# Altium PCB ESB32_PCB.PcbDoc
Units mil, origin at the board's own origin, x right, y up, seen from the top; angles counter-clockwise.
Board outline 3464.57 x 1446.85 mil, 4 copper layers (Top Layer, +3V3, Int2 (PWR), Bottom Layer), stack 53.912 mil thick; 47 components, 47 nets, 208 pads, 70 vias.
Unrouted connection lines stored in the file: 17.
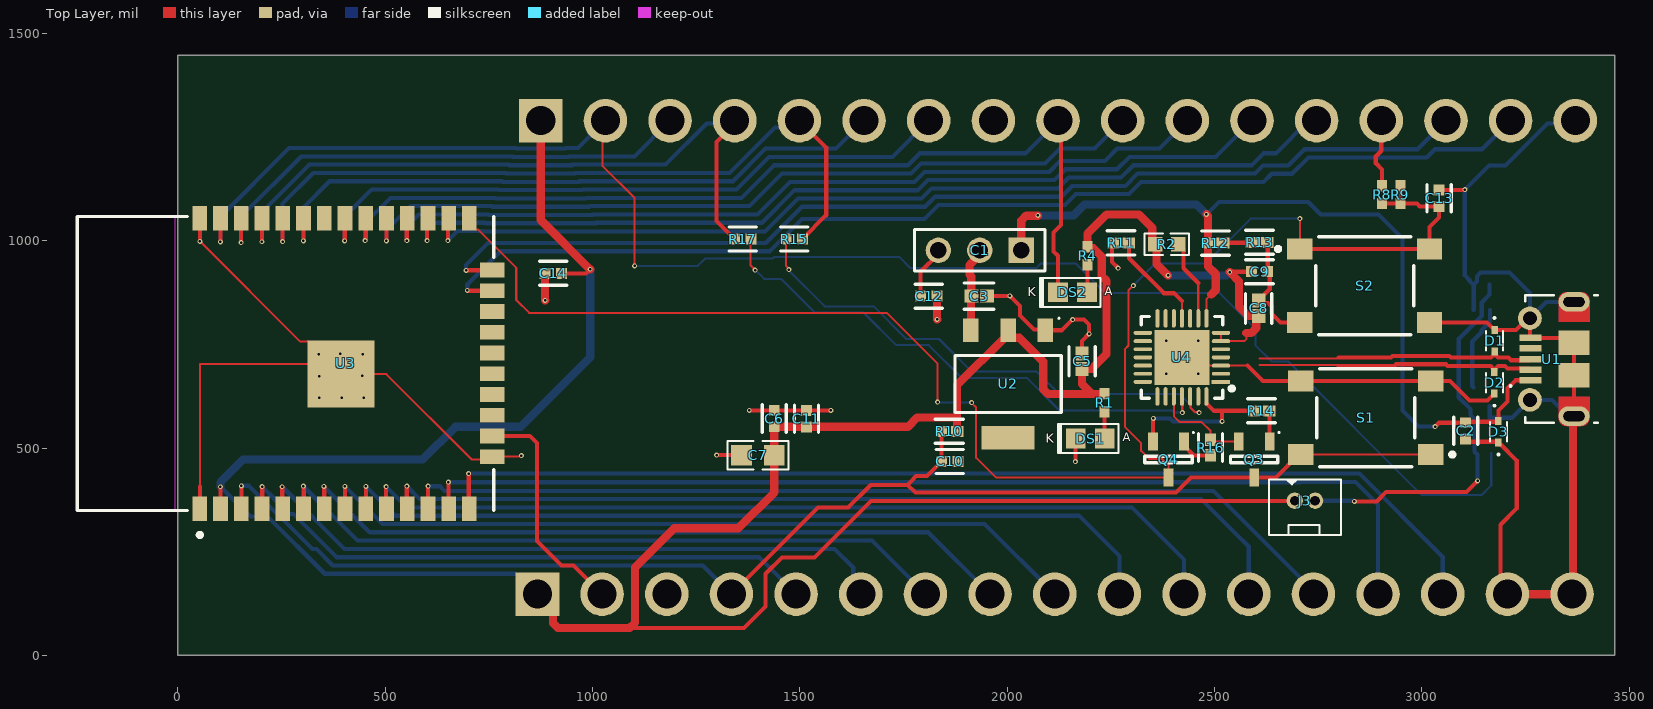
[diagram p0: Top Layer view]
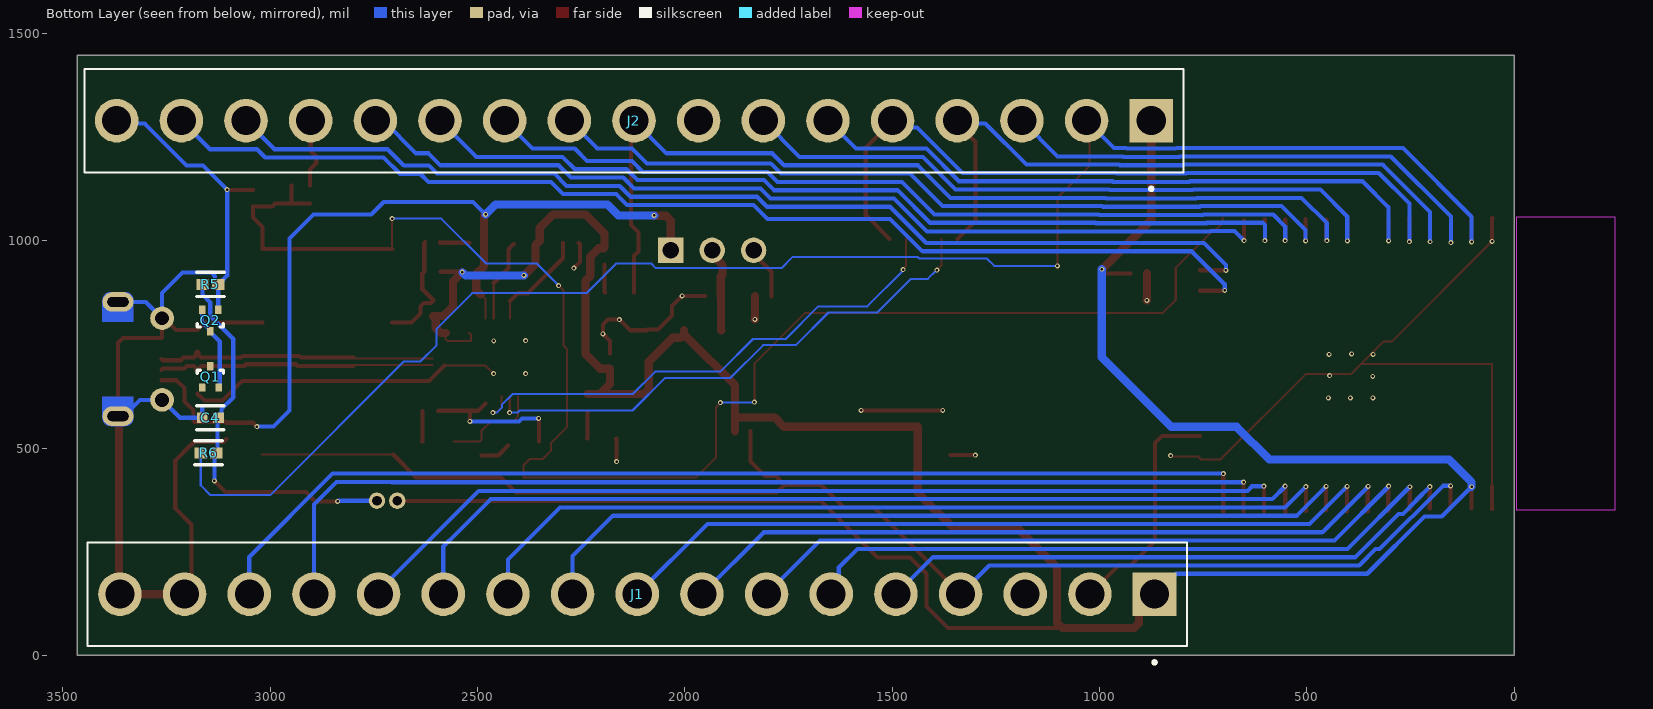
[diagram p1: Bottom Layer view, seen from below]
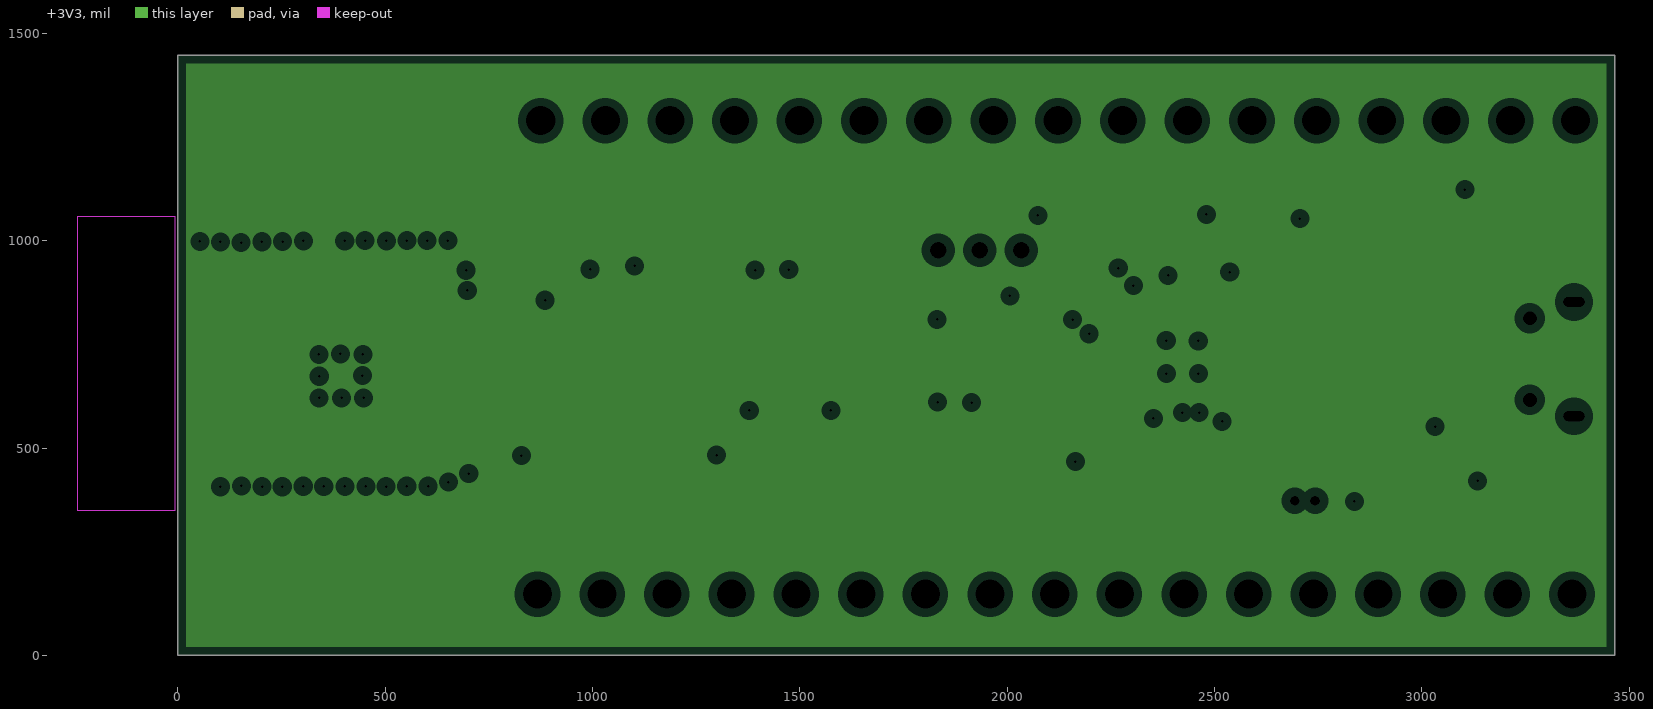
[diagram p2: +3V3, clearances drawn from the general rule]
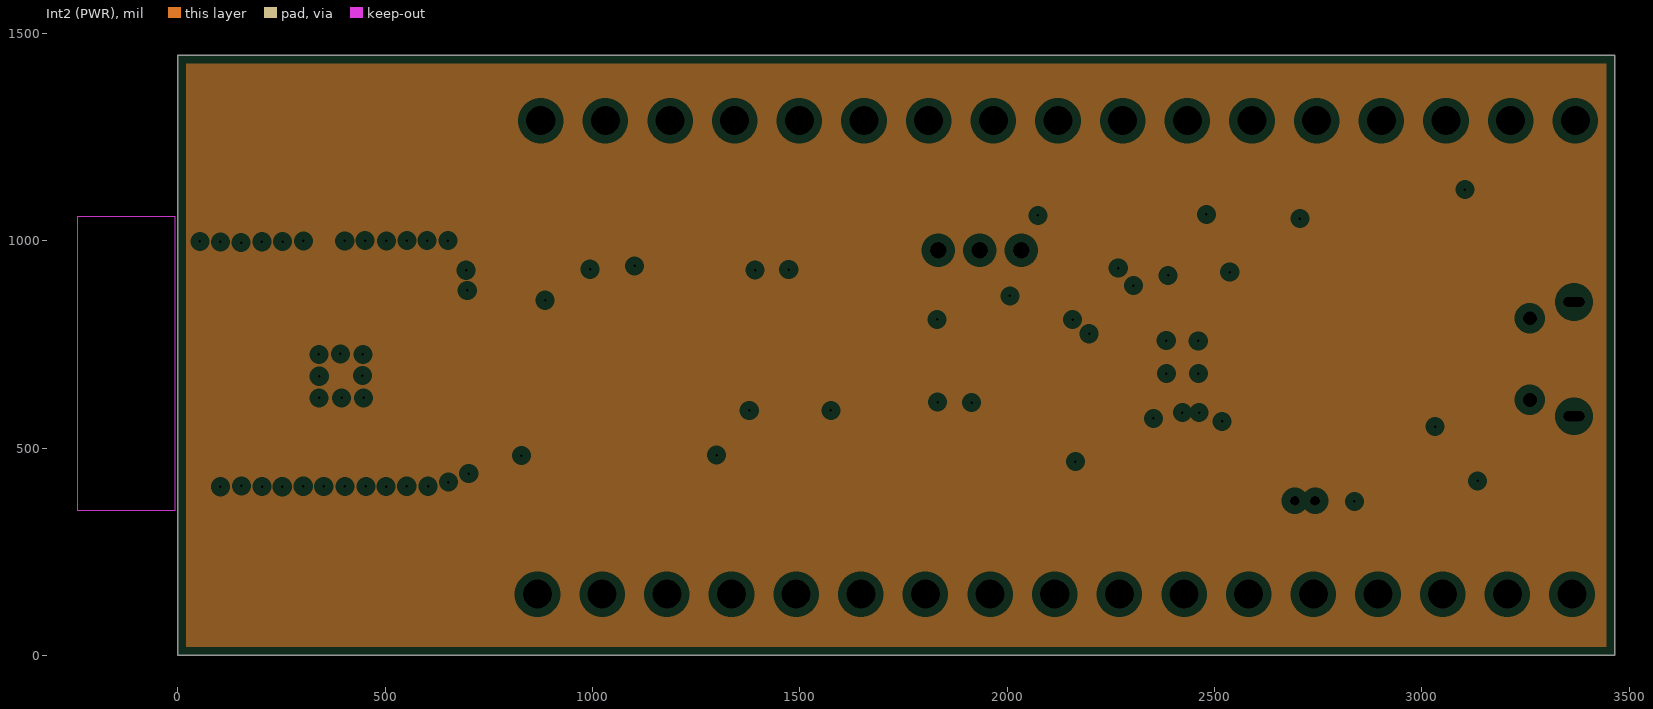
[diagram p3: Int2 (PWR), clearances drawn from the general rule]
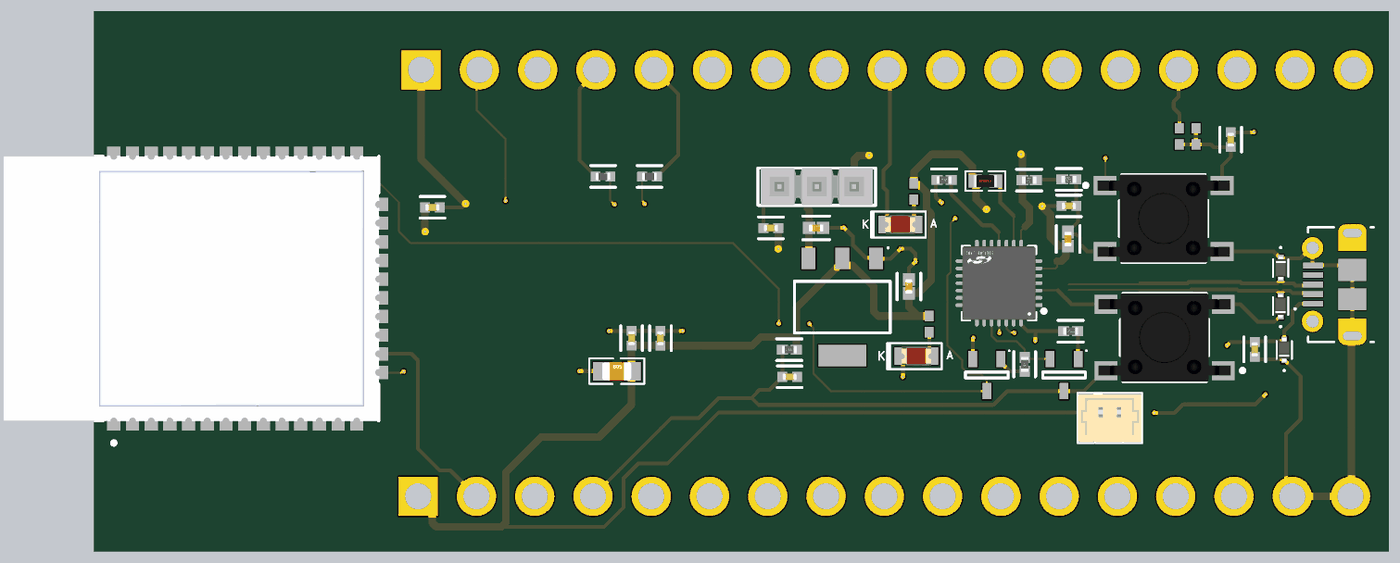
[diagram p4: 3D render of the assembled board from above, using the file's embedded part models]
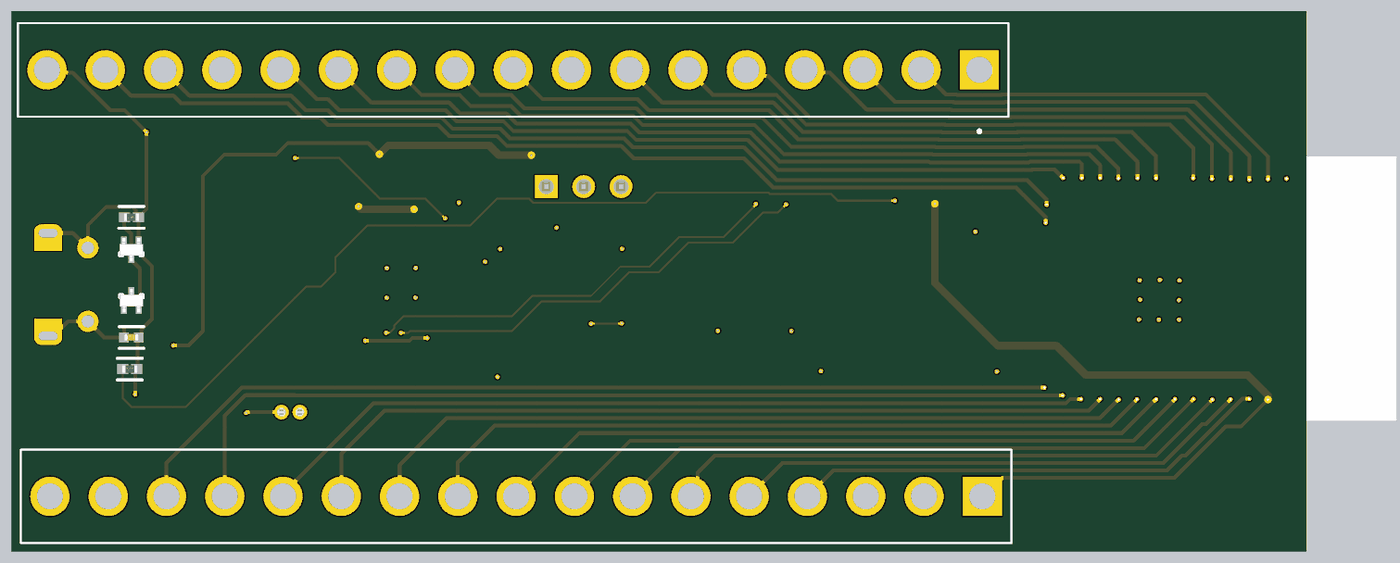
[diagram p5: 3D render of the assembled board from below, using the file's embedded part models]

## Layer stack, top to bottom
Top Solder: solder mask 1, SM-001, Dk 4
Top Layer: signal copper 1.378
Dielectric 1: prepreg 5.1, PP-017, Dk 4.3
Dielectric 2: prepreg 5.1, PP-017, Dk 4.3
+3V3: plane copper 1.378
Dielectric 3: core 28, Core-039, Dk 4.8
Int2 (PWR): plane copper 1.378
Dielectric 4: prepreg 5.1, PP-017, Dk 4.3
Dielectric 5: prepreg 5.1, PP-017, Dk 4.3
Bottom Layer: signal copper 1.378
Bottom Solder: solder mask 1, SM-001, Dk 4

## Board outline
0,0 3464.57,0 3464.57,1446.85 0,1446.85

## Design rules (kind name [scope] priority, off if disabled: settings)
Clearance [All] p1: gap=3.94 ignorepadtopadclearanceinfootprint=TRUE
DiffPairsRouting [All] p1: maxlimit=10 minlimit=10 mostfreqgap=10 toplayer_minwidth=5 toplayer_maxwidth=15 toplayer_prefwidth=10 bottomlayer_minwidth=5 bottomlayer_maxwidth=15 bottomlayer_prefwidth=10 maxuncoupledlength=500
MinimumSolderMaskSliver [All] p1: minsoldermaskwidth=1
PlaneClearance [All] p1: clearance=20
PlaneConnect [All] p1: planeconnectstyle=Direct reliefexpansion=20 reliefentries=4 reliefconductorwidth=10 reliefairgap=10
PolygonConnect [All] p1: connectstyle=Direct reliefconductorwidth=10 reliefentries=4 polygonreliefangle="90 Angle" airgapwidth=10
RoutingVias [All] p1: holewidth=8 width=8 viastyle="Through Hole" minholewidth=8 minwidth=18 maxholewidth=24 maxwidth=24
SilkToSilkClearance [All] p1: silktosilkclearance=5
SilkToSolderMaskClearance [IsPad] p1: minsilkscreentomaskgap=2 clearancetoexposedcopper=TRUE
SolderMaskExpansion [All] p1: expansion=4 istentingtop=FALSE
UnRoutedNet [All] p1: checkbadconnections=TRUE
Width [All] p1: maxlimit=20 minlimit=5 preferedwidth=10
23 further rules are at their usual default settings.

## Classes and differential pairs
differential pair class D90: USB
differential pair USB: +USB_P -USB_N

## Components (designator, comment, footprint, x,y, rotation, side; value= is the part's Value field where it differs from the comment)
C1 "TSW-103-07-T-S" x3Pins_CONN_SMTC-TSW-103-07-x-s 1933.82,976.88 r180 top
C2 "CC0402KPX7R7BB104" Yageo_CC0402KPX 3105.52,541.23 r270 top
C3 "CL05A106MP5NUNC" SAMSUNG_CAP_10uF_0402 1932.19,864.28 r0 top
C4 "CC0402KPX7R7BB104" Yageo_CC0402KPX 3143.74,573.04 r0 bottom
C5 "CL05A106MP5NUNC" SAMSUNG_CAP_10uF_0402 2182.36,709.43 r90 top
C6 "CC0402KPX7R7BB104" Yageo_CC0402KPX 1438.24,571.19 r90 top
C7 "22uF" CAP_0805 1398.87,482.61 r0 top
C8 "4.7uF, PN_CL05A475KP5NRNC" SAMSUNG_CAP_10uF_0402 2608.27,836.61 r90 top
C9 "CC0402KPX7R7BB104" Yageo_CC0402KPX 2608.27,925.2 r0 top
C10 "CC0402KPX7R7BB104" Yageo_CC0402KPX 1861.38,467.67 r0 top
C11 "CC0402KPX7R7BB104" Yageo_CC0402KPX 1515.75,570.87 r90 top
C12 "CC0402KPX7R7BB104" Yageo_CC0402KPX 1811.02,866.14 r0 top
C13 "CC0402KPX7R7BB104" Yageo_CC0402KPX 3041.34,1102.45 r90 top
C14 "CC0402KPX7R7BB104" Yageo_CC0402KPX 905.37,921.22 r180 top
D1 "LESD5D5.0CT1G" LESD5D5.0CT1G 3173.93,759.73 r270 top
D2 "LESD5D5.0CT1G" LESD5D5.0CT1G 3175.62,656.22 r90 top
D3 "LESD5D5.0CT1G" LESD5D5.0CT1G 3185.41,538.57 r90 top
DS1 "GREEN LED" LED_0805 2200.29,522.92 r0 top
DS2 "RED LED" LED_0805 2157.28,875.31 r0 top
J1 "1-640383-7" TE_17Pin_HDR 2041.57,151.64 r0 bottom
J2 "1-640383-7" TE_17Pin_HDR 2049.44,1293.37 r0 bottom
J3 "653002114822" CON2_50_653002114822_TH_ST 2717.78,373.08 r0 top
Q1 "2N7002T-7-F" 2N7002T-7-F 3143.74,671.75 r180 bottom
Q2 "2N7002T-7-F" 2N7002T-7-F 3144.09,807.6 r0 bottom
Q3 "SS8050-G" BJT_NPN_SS8050-G 2598.43,472.44 r270 top
Q4 "SS8050-G" BJT_NPN_SS8050-G 2391.73,472.44 r270 top
R1 "CPF0402B5K1E1" TE_Connectivity_5.1K_0402 2234.64,608.85 r270 top
R2 "1K_Suppose 2 be 0402" RES_0603 2384.95,991.67 r180 top
R4 "560OHM_PN_3521560RFT" TE_Connectivity_5.1K_0402 2193.72,963.62 r90 top
R5 "CRGCQ0402J10K" TE_Connectivity_10K_0402 3143.74,895.67 r180 bottom
R6 "CRGCQ0402J10K" TE_Connectivity_10K_0402 3148.26,487.44 r0 bottom
R8 "22 OHM_PN_AC0402FR-0722RL" TE_Connectivity_5.1K_0402 2903.75,1111.28 r270 top
R9 "22 OHM_PN_AC0402FR-0722RL" TE_Connectivity_5.1K_0402 2948.19,1111.28 r270 top
R10 "CRGCQ0402J10K" TE_Connectivity_10K_0402 1860.24,541.34 r0 top
R11 "NF" TE_Connectivity_10K_0402 2274.51,993.67 r180 top
R12 "6-2176364-6" TE_Connectivity_22.1K_0402#1 2501.92,996.09 r180 top
R13 "47.5K_0402WGF4752TCE" TE_Connectivity_22.1K_0402#2 2608.27,994.09 r180 top
R14 "CRGCQ0402J10K" TE_Connectivity_10K_0402 2613.01,590.79 r0 top
R15 "ERJ-2GE0R00X" PANASONIC_0_OHM_0402 1486.22,1003.94 r180 top
R16 "CRGCQ0402J10K" TE_Connectivity_10K_0402 2491.16,501.03 r270 top
R17 "ERJ-2GE0R00X" PANASONIC_0_OHM_0402 1362.11,1003.94 r0 top
S1 "PTS645SH50SMTR92LFS" "C&K Tactile SW" 2864.38,572.94 r180 top
S2 "PTS645SH50SMTR92LFS" "C&K Tactile SW" 2861.81,891.41 r0 top
U1 "1050170001" MOLEX_1050170001 3363.7,715.54 r90 top
U2 "AMS1117" ASM1117-3V3_SOT229P700X180-4N 1998.03,659.45 r270 top
U3 "." ESP-WROOM-32 399.84,680.94 r90 top
U4 "." CP21002N-A02 2421.26,718.5 r180 top

## Footprints (in the part's own frame and the unit in brackets; to place one, negate y for a bottom-side part, rotate by r counter-clockwise, add the part's x,y. Pads: shape width x height; smd on the part's side, far side on the other; paste and mask are expansions set on the pad)
2N7002T-7-F [mm]
  rect 0.4x0.51 smd paste+0 mask+0: 1(0,0.65) 2(-0.5,-0.65) 3(0.5,-0.65)
  silkscreen extent -0.8,0.2 0.8,0.4, body extent -0.8,-0.8 0.8,0.8, height 0.8
ASM1117-3V3_SOT229P700X180-4N [mm]
  rect 1.45x0.95 smd: 1(-3.173,2.392) 2(-3.173,0.102) 3(-3.173,-2.188)
  rect 1.45x3.25 smd: 4(3.427,0.102)
  silkscreen extent -3.9,-3.15 1.88,3.35
BJT_NPN_SS8050-G [mm]
  rect 1.1x0.6 smd: 1(-1.1,0.874) 2(-1.1,-1.026) 3(1.1,-0.076)
  silkscreen extent -1.68,-1.53 0.2,1.47
"C&K Tactile SW" [mm]
  rect 1.55x1.3 smd paste+0 mask+0: 1(-3.975,2.25) 2(3.975,2.25) 3(-3.975,-2.25) 4(3.975,-2.25)
  silkscreen extent -5.43,-3 3,3, body extent -4.85,-3.1 4.85,3.1, height 0.25
CAP_0805 [mil] "Ceramic Capacitor"
  rect 50x50 smd mask+3: 1(-39.37,0) 2(39.37,0)
  silkscreen extent -73,-34 73,34, body extent -39,-25 39,25, height 31
CON2_50_653002114822_TH_ST [mm] "WR-WTB 1.25 mm Male Vertical Shrouded Header"
  round 1 hole 0.6: 1(-0.625,0) 2(0.625,0)
  silkscreen extent -2.2,-2.1 2.2,1.3, body extent -2.12,-2 2.13,1.2, height 4.21
CP21002N-A02 [mm]
  rect 1.131x0.242 smd paste+0 mask+0: 1(-2.391,1.5)
  rrect100% 1.131x0.242 smd paste+0 mask+0: 2(-2.391,1) 3(-2.391,0.5) 4(-2.391,0) 5(-2.391,-0.5) 6(-2.391,-1) 7(-2.391,-1.5) 15(2.391,-1.5) 16(2.391,-1) 17(2.391,-0.5) 18(2.391,0) 19(2.391,0.5) 20(2.391,1) 21(2.391,1.5)
  rrect100% 0.242x1.131 smd paste+0 mask+0: 8(-1.5,-2.391) 9(-1,-2.391) 10(-0.5,-2.391) 11(0,-2.391) 12(0.5,-2.391) 13(1,-2.391) 14(1.5,-2.391) 22(1.5,2.391) 23(1,2.391) 24(0.5,2.391) 25(0,2.391) 26(-0.5,2.391) 27(-1,2.391) 28(-1.5,2.391)
  rect 3.35x3.35 smd paste-1000 mask+0: 29(0,0)
  silkscreen extent -3.17,-2.5 2.5,2.5, body extent -2.5,-2.5 2.5,2.5, height 0.8
ESP-WROOM-32 [mm]
  rect 1.5x0.9 smd paste+0 mask+0: 1(-8.316,8.806) 2(-8.316,7.536) 3(-8.316,6.266) 4(-8.316,4.996) 5(-8.316,3.726) 6(-8.316,2.456) 7(-8.316,1.186) 8(-8.316,-0.084) 9(-8.316,-1.354) 10(-8.316,-2.624) 11(-8.316,-3.894) 12(-8.316,-5.164) 13(-8.316,-6.434) 14(-8.316,-7.704) 25(9.484,-7.704) 26(9.484,-6.434) 27(9.484,-5.164) 28(9.484,-3.894) 29(9.484,-2.624) 30(9.484,-1.354) 31(9.484,-0.084) 32(9.484,1.186) 33(9.484,2.456) 34(9.484,3.726) 35(9.484,4.996) 36(9.484,6.266) 37(9.484,7.536) 38(9.484,8.806)
  rect 0.9x1.5 smd paste+0 mask+0: 15(-5.126,-9.094) 16(-3.856,-9.094) 17(-2.586,-9.094) 18(-1.316,-9.094) 19(-0.046,-9.094) 20(1.224,-9.094) 21(2.494,-9.094) 22(3.764,-9.094) 23(5.034,-9.094) 24(6.304,-9.094)
  rect 4.1x4.1 smd paste+0 mask+0: 39(-0.066,0.156)
  Keep-Out Layer region: -8.416,10.306 9.584,10.306 9.584,16.306 -8.416,16.306
  silkscreen extent -10.04,-9.19 9.58,16.31, body extent -9.17,-9.94 10.33,16.51, height 0.25
LED_0805 [mm] "LED"
  rect 1.2x1.2 smd mask+0.076: A(0.889,0) K(-0.889,0)
  silkscreen extent -1.99,-0.89 1.73,0.89, body extent -1.01,-0.62 1.01,0.63, height 1.1
LESD5D5.0CT1G [mm]
  rect 0.48x0.4 smd: 1(-0.635,0.025) 2(0.685,0.025)
  silkscreen extent -1.42,-0.49 0.63,0.55, body extent -0.77,-0.37 0.83,0.43, height 0.7
MOLEX_1050170001 [mm]
  rect 0.4x1.35 smd mask+0.064: 1(-1.325,2.601) 2(-0.675,2.601) 3(-0.025,2.601) 4(0.625,2.601) 5(1.275,2.601)
  round 1.45 hole 0.85 mask+0.064: SH1(-2.525,2.626) SH2(2.475,2.626)
  oval 1.2x1.9 hole 0.6 slot 1.3 at 90 deg mask+0: SH3(-3.525,-0.074) SH6(3.475,-0.074)
  rect 1.5x1.9 smd mask+0.064: SH4(-1.025,-0.074) SH5(0.975,-0.074)
  Top Layer region: -2.325,-1.024 -3.625,-1.024 -3.651,-1.023 -3.677,-1.021 -3.703,-1.018 -3.729,-1.013 -3.754,-1.007 -3.78,-1 -3.804,-0.991 -3.828,-0.981 -3.852,-0.97 -3.875,-0.957 -3.897,-0.943 -3.919,-0.929 -3.94,-0.913 -3.96,-0.896 -3.979,-0.878 -3.997,-0.859 -4.014,-0.839 -4.03,-0.818 -4.044,-0.796 -4.058,-0.774 -4.071,-0.751 -4.082,-0.727 -4.092,-0.703 -4.101,-0.679 -4.108,-0.653 -4.114,-0.628 -4.119,-0.602 -4.122,-0.576 -4.124,-0.55 -4.125,-0.524 -4.125,0.376 -4.124,0.402 -4.122,0.428 -4.119,0.454 -4.114,0.48 -4.108,0.505 -4.101,0.531 -4.092,0.555 -4.082,0.579 -4.071,0.603 -4.058,0.626 -4.044,0.648 -4.03,0.67 -4.014,0.691 -3.997,0.711 -3.979,0.73 -3.96,0.748 -3.94,0.765 -3.919,0.781 -3.897,0.795 -3.875,0.809 -3.852,0.822 -3.828,0.833 -3.804,0.843 -3.78,0.852 -3.754,0.859 -3.729,0.865 -3.703,0.87 -3.677,0.873 -3.651,0.875 -3.625,0.876 -2.325,0.876
  Top Layer region: 3.601,0.875 3.627,0.873 3.653,0.87 3.679,0.865 3.704,0.859 3.73,0.852 3.754,0.843 3.778,0.833 3.802,0.822 3.825,0.809 3.847,0.795 3.869,0.781 3.89,0.765 3.91,0.748 3.929,0.73 3.947,0.711 3.964,0.691 3.98,0.67 3.994,0.648 4.008,0.626 4.021,0.603 4.032,0.579 4.042,0.555 4.051,0.531 4.058,0.505 4.064,0.48 4.069,0.454 4.072,0.428 4.074,0.402 4.075,0.376 4.075,-0.524 4.074,-0.55 4.072,-0.576 4.069,-0.602 4.064,-0.628 4.058,-0.653 4.051,-0.679 4.042,-0.703 4.032,-0.727 4.021,-0.751 4.008,-0.774 3.994,-0.796 3.98,-0.818 3.964,-0.839 3.947,-0.859 3.929,-0.878 3.91,-0.896 3.89,-0.913 3.869,-0.929 3.847,-0.943 3.825,-0.957 3.802,-0.97 3.778,-0.981 3.754,-0.991 3.73,-1 3.704,-1.007 3.679,-1.013 3.653,-1.018 3.627,-1.021 3.601,-1.023 3.575,-1.024 2.275,-1.024 2.275,0.876 3.575,0.876
  Bottom Layer region: 3.601,0.875 3.627,0.873 3.653,0.87 3.679,0.865 3.704,0.859 3.73,0.852 3.754,0.843 3.778,0.833 3.802,0.822 3.825,0.809 3.847,0.795 3.869,0.781 3.89,0.765 3.91,0.748 3.929,0.73 3.947,0.711 3.964,0.691 3.98,0.67 3.994,0.648 4.008,0.626 4.021,0.603 4.032,0.579 4.042,0.555 4.051,0.531 4.058,0.505 4.064,0.48 4.069,0.454 4.072,0.428 4.074,0.402 4.075,0.376 4.075,-0.524 4.074,-0.55 4.072,-0.576 4.069,-0.602 4.064,-0.628 4.058,-0.653 4.051,-0.679 4.042,-0.703 4.032,-0.727 4.021,-0.751 4.008,-0.774 3.994,-0.796 3.98,-0.818 3.964,-0.839 3.947,-0.859 3.929,-0.878 3.91,-0.896 3.89,-0.913 3.869,-0.929 3.847,-0.943 3.825,-0.957 3.802,-0.97 3.778,-0.981 3.754,-0.991 3.73,-1 3.704,-1.007 3.679,-1.013 3.653,-1.018 3.627,-1.021 3.601,-1.023 3.575,-1.024 2.275,-1.024 2.275,0.876 3.575,0.876
  Bottom Layer region: -2.325,-1.024 -3.625,-1.024 -3.651,-1.023 -3.677,-1.021 -3.703,-1.018 -3.729,-1.013 -3.754,-1.007 -3.78,-1 -3.804,-0.991 -3.828,-0.981 -3.852,-0.97 -3.875,-0.957 -3.897,-0.943 -3.919,-0.929 -3.94,-0.913 -3.96,-0.896 -3.979,-0.878 -3.997,-0.859 -4.014,-0.839 -4.03,-0.818 -4.044,-0.796 -4.058,-0.774 -4.071,-0.751 -4.082,-0.727 -4.092,-0.703 -4.101,-0.679 -4.108,-0.653 -4.114,-0.628 -4.119,-0.602 -4.122,-0.576 -4.124,-0.55 -4.125,-0.524 -4.125,0.376 -4.124,0.402 -4.122,0.428 -4.119,0.454 -4.114,0.48 -4.108,0.505 -4.101,0.531 -4.092,0.555 -4.082,0.579 -4.071,0.603 -4.058,0.626 -4.044,0.648 -4.03,0.67 -4.014,0.691 -3.997,0.711 -3.979,0.73 -3.96,0.748 -3.94,0.765 -3.919,0.781 -3.897,0.795 -3.875,0.809 -3.852,0.822 -3.828,0.833 -3.804,0.843 -3.78,0.852 -3.754,0.859 -3.729,0.865 -3.703,0.87 -3.677,0.873 -3.651,0.875 -3.625,0.876 -2.325,0.876
  silkscreen extent -3.93,-1.52 3.87,3.86
PANASONIC_0_OHM_0402 [mil]
  rect 26.31x26.48 smd paste+0 mask+0: 1(-19.77,0) 2(19.77,0)
  silkscreen extent -33,-29 33,29, body extent -41,-21 41,21, height 10
RES_0603 [mil] "CASE: 0603"
  rect 35x35 smd mask+3: 1(-27.5,0) 2(27.5,0)
  silkscreen extent -53,-26 54,26, body extent -31,-16 31,16, height 18
SAMSUNG_CAP_10uF_0402 [mil]
  rect 33.69x31.74 smd paste+0 mask+0: 1(-18.71,2) 2(18.71,2)
  silkscreen extent -36,-30 36,34, body extent -43,-22 43,26, height 10
TE_17Pin_HDR [mil]
  rect 105x105 hole 70: 1(-1174.24,4)
  round 105 hole 70: 2(-1018.34,4) 3(-862.43,4) 4(-706.53,4) 5(-550.62,4) 6(-394.72,4) 7(-238.81,4) 8(-82.91,4) 9(73,4) 10(228.91,4) 11(384.81,4) 12(540.72,4) 13(696.62,4) 14(852.53,4) 15(1008.43,4) 16(1164.34,4) 17(1320.24,4)
  silkscreen extent -1252,-121 1398,172
TE_Connectivity_5.1K_0402 [mm]
  rect 0.7x0.6 smd: 1(-0.55,0) 2(0.55,0)
TE_Connectivity_10K_0402 [mil]
  rect 29.91x26.48 smd paste+0 mask+0: 1(-18.75,-1) 2(18.75,-1)
  silkscreen extent -34,-30 34,28, body extent -20,-11 20,9, height 16
TE_Connectivity_22.1K_0402#1 [mil]
  rect 31.88x26.48 smd paste+0 mask+0: 1(-17.77,2) 2(17.77,2)
  silkscreen extent -34,-27 34,31, body extent -42,-19 42,23, height 10
TE_Connectivity_22.1K_0402#2 [mil]
  rect 31.88x26.48 smd paste+0 mask+0: 1(-17.77,-2) 2(17.77,-2)
  silkscreen extent -34,-31 34,27, body extent -20,-12 20,8, height 16
x3Pins_CONN_SMTC-TSW-103-07-x-s [mm]
  rect 1.55x1.55 hole 1.02: 1(-2.54,0)
  round 1.55 hole 1.02: 2(0,0) 3(2.54,0)
  silkscreen extent -4,-1.27 4,1.27, body extent -3.81,-1.27 3.81,1.27, height 8.38
Yageo_CC0402KPX [mil]
  rect 26.31x26.48 smd paste+0 mask+0: 1(-19.77,0) 2(19.77,0)
  silkscreen extent -33,-29 33,29, body extent -41,-21 41,21, height 10

## Part data
C1: library part HDR_3x_Pins_Male_Board/Board/Cable, "0.025\" SQ Post Header, Through-hole, Vertical, -55 to 105 degC, 2.54 mm Pitch, 3-Pin, Male, RoHS"
C2 C4 C6 C9 C10 C11 C12 C13 C14: library part CAP_100nF_0.1uF_10V_0402, "Multilayer Ceramic Capacitor, 0.1 uF, 10 V, ± 10%, X7R, 0402 [1005 Metric]"
C3 C5 C8: library part CAP_10uF_10V_SMD_0402, "Multilayer Ceramic Capacitor, 10 uF, 10 V, ± 20%, X5R, 0402 [1005 Metric]"
C7: library part CAP_22uF-25V-20%-0805, "22µF ±20% 25V Ceramic Capacitor X5R 0805 (2012 Metric)", Alternate Part Number-1=NA, Case/Package=0805, Manufacturer=Murata, Manufacturer Part Number=GRM21BR61E226ME44L, Supplier Part Number-1=C86816, Supplier-1=LCSC
D1 D2 D3: library part DIO_Transient_VOl_Suppressor_ESD_PROTECTION, "Transient Voltage Suppressors for ESD Protection"
DS1: library part LED_GREEN-2.2-20mA-0805, "Green 569nm LED Indication - Discrete 2.1V 0805 (2012 Metric)", Alternate Part Number-1=NA, Case/Package=0805, Manufacturer="Vishay Lite-On", Manufacturer Part Number=LTST-C171GKT, Supplier Part Number-1=LTST-C171GKT, Supplier-1="SP ROAD"
DS2: library part LED_RED-2V-20mA-0805, "Red 631nm LED Indication - Discrete 2V 0805 (2012 Metric)", Alternate Part Number-1=NA, Case/Package=0805, Manufacturer="Vishay Lite-On", Manufacturer Part Number=LTST-C171KRKT, Supplier Part Number-1=LTST-C171KRKT, Supplier-1="SP ROAD"
J1 J2: library part HDR_CON_x17Pin, "Conn Unshrouded Header HDR 17 POS 3.96mm Solder ST Thru-Hole Package"
J3: library part CON-PLG_2X1-50-ST-TH, "2 Pins, 1 Row 1.25mm Pitch, Straight Connector, male", Alternate Part Number-1=NA, Case/Package=TH-CON, Crimp Part Number=653153128130, Manufacturer=JST, Mating Part Number=653002113322, Manufacturer Part Number=653002114822, Supplier Part Number-1=653002114822, Supplier-1=WURTH
Q1 Q2: library part TRN_MOSFET_N-CH_60V_0.115A, "Transistor MOSFET N-CH 60V 0.115A 3-Pin SOT-523 T/R - Tape and Reel"
Q3 Q4: library part BJT_SS8050-G_NPN, "Bipolar Transistors - BJT NPN TRANSISTOR 1.5A 40V"
R1 R4 R8 R9: library part RES_5.1K_0402, "Res Thin Film 0402 5.1K Ohm 0.1% 1/16W ±25ppm/°C Molded SMD SMD Paper T/R"
R2: library part RES_1K-0.1W-1%-0603, "1 kOhms ±1% 0.1W, 1/10W Chip Resistor 0603 (1608 Metric) Automotive AEC-Q200 Thick Film", Alternate Part Number-1=0603WAF1001T5E, Case/Package=0603, Manufacturer=Walsin, Manufacturer Part Number=WR06X1001FTL, Supplier Part Number-1=WR06X1001FTL, Supplier-1=SIRICOM
R5 R6 R10 R11 R14 R16: library part RES_10K_0402_SMD, "SMD Chip Resistor, 10 kOhm, ± 5%, 63 mW, 0402 [1005 Metric], Thick Film, General Purpose"
R12 R13: library part RES_22.1KOHM_0402, "Res Precision Thin Film 22.1kOhm 0.1% 62.5mW 10ppm/°C 2-Pin 0402 SMD T/R"
R15 R17: library part RES_0_OHM_0402, "SMD Chip Resistor, Jumper, 0 ohm, 100 mW, 0402 [1005 Metric], Thick Film, General Purpose"
S1 S2: library part SW_Tactile_0.05A,12VDC_SMD, "Switch Tactile N.O. SPST Round Button Gull Wing 0.05A 12VDC 100000Cycles 1.96N SMD T/R"
U1: library part "USB_Micro_B 2.0_MOLEX", "USB - micro B USB 2.0 Receptacle Connector 5 Position Surface Mount, Right Angle; Through Hole"
U2: library part VREG_1117_1A_LDO, "ASM1117, 5V to 3V3, 1A."
U3: library part IC_Espressif_ESP-WROOM-32_eec, "IC SPRESSIF ESP32 BLUETOOTH WIFI MESP-WROOM-32 is a powerful, generic Wi-Fi+BT+BLE MCU module"
U4: library part IC_CP2102N-A02-GQFN28R, "Integrated Circuit Interface USB for UART Controller; 3-3.6V; -40+85 deg.C; SMD; QFN28"

## Via types
v1: diameter 12, hole 6, Top Layer to Bottom Layer, 70 vias

## Nets (pads, with @x,y where several pads share a name; then routed paths per layer and width w, separated by ;. In a path a pad name is that pad's centre, name@x,y a point inside that pad or via, vN(x,y) a via of type N, cw(c..) or ccw(c..) an arc to the next point about the centre after c; other vN are vias at no path point)
+3V3: C5.1 C6.1 C7.2 C8.1 C9.1 C11.1 C14.1 J1.1 J2.1 J3.1 R1.1 R2.2 R4.2 R10.2 U2.2 U3.2 U4.6 U4.7 | length 7784.6
  Top Layer w5: U4.7@2519.69,777.56 2515.38,773.25 U4.6 2571.82,757.87 2576.65,762.7 2576.65,766.85 2576.6,766.9 2576.6,777.56
  Top Layer w10: U3.2@102.84,354.02 v1(102.84,406.66) ; C14.1 983.86,921.22 993.73,931.09 v1(994.27,931.09) ; 1089.58,65.96 1365.17,65.96 1417.32,118.11 1417.32,196.85 1456.69,236.22 1535.43,236.22 1671.69,372.48 2692.58,372.48 J3.1 ; v1(2536.54,924.36) 2537.08,924.36 2537.92,925.2 C9.1
  Top Layer w20: J1.1 904.79,110.17 904.79,77.68 916.5,65.96 1089.58,65.96 1102.36,78.74 1102.36,211.84 1197.16,306.64 1351.52,306.64 1438.24,393.36 C7.2 C6.1 ; J2.1 875.2,1050.16 v1(994.27,931.09) ; C6.1@1438.4,551.26 1515.59,551.26 C11.1 1760.48,551.1 1782.96,573.58 1878.99,573.58 ; R10.2 1878.99,651.48 1993.33,765.83 U2.2@2002.03,774.53 ; U2.2 U2.2@2002.03,774.53 ; R1.1 2204.16,630.5 ; v1(2387.83,916.15) 2359.81,944.17 2359.81,989.31 2349.95,999.17 2349.95,1030.34 2317.29,1062.99 2239.76,1062.99 2193.72,1016.95 2193.72,983.31 2195.53,981.5 2208.07,981.5 2227.72,961.85 2227.72,915.4 2239.48,903.63 2239.48,726.27 2204.51,691.3 2180.94,691.3 C5.1 2180.36,654.3 2204.16,630.5 ; v1(2536.54,924.36) 2559.06,901.84 2559.06,841.54 2582.11,818.48 2605.69,818.48 C8.1 2600.4,812.03 2600.4,789.27 2588.68,777.56 2576.6,777.56 ; U2.2@2002.03,774.53 2010.73,765.83 2029.45,765.83 2086.61,708.66 2086.61,642.22 2098.33,630.5 2204.16,630.5
  Bottom Layer w10: v1(102.84,406.66) 174.85,334.65 216.54,334.65 354.33,196.85 813.96,196.85 815.68,195.14 819.82,195.14 J1.1
  Bottom Layer w20: v1(102.84,406.66) 102.84,417.8 157.48,472.44 590.55,472.44 669.29,551.18 826.77,551.18 994.27,718.68 v1(994.27,931.09) ; v1(2387.83,916.15) 2528.87,916.15 v1@2535.85,923.13
+5V: C1.2 C3.1 U2.3 | length 193
  Top Layer w20: U2.3 1912.67,785.17 C3.1@1912.67,865.48 ; C3.1 1913.48,913.46 1909.03,917.9 1909.03,940.99 C1.2@1933.82,965.78
+5V_EXT: C1.3 C12.1 | length 128.4
  Top Layer w10: C12.1 1791.25,925.11 1833.82,967.68 C1.3
+5V_VBUS: C1.1 C2.1 D3.2 R12.2 U1.1 U4.8 | length 2153.6
  Top Layer w5: U4.8 2480.31,858.51 2491.94,870.14
  Top Layer w10: v1@3031.5,551.18 3041.31,561 C2.1 3107.8,563.27 3182.14,563.27 D3.2 3184.41,590.61 3206.44,612.63 3206.44,644.4 3225.4,663.36 U1.1
  Top Layer w20: C1.1 2033.82,1048.66 2045.54,1060.38 v1@2073.84,1060.38 ; v1(2480.31,1063.53) 2484.15,1059.69 R12.2 2484.15,937.83 2502.74,919.24 2502.74,880.94 2491.94,870.14
  Bottom Layer w10: v1(2480.31,1063.53) 2480.86,1063.53 2510.4,1093.07 2725.82,1093.07 2755.91,1062.99 2894.8,1062.99 2952.76,1005.04 2952.76,590.55 2991.58,551.72 v1(3031.5,551.72)
  Bottom Layer w20: v1(2073.84,1060.92) 2160.24,1060.92 2186.53,1087.2 2456.1,1087.2 v1@2480.31,1062.99
DTR: Q4.2 R14.1 U4.28 | length 369.7
  Top Layer w10: Q4.2@2351.79,516.2 v1@2351.79,570.39 ; U4.28@2480.75,607.3 2498.26,589.79 2519.69,589.79 ; v1(2518.21,564.25) 2518.21,588.31 2519.69,589.79 ; R14.1 2519.69,589.79
  Bottom Layer w10: v1(2352.47,571.62) 2392.29,571.62 2399.66,564.25 2517.28,564.25 v1@2517.82,563.7
EN: C10.1 J1.4 Q3.3 R10.1 S1.1 S1.2 U3.3 | length 3362.5
  Top Layer w5: S1.2@2702.96,484.36 S1.2 S1.1
  Top Layer w10: U3.3@153.27,355.75 v1(153.27,408.94) ; J1.4 1544.07,356.66 1616.51,356.66 1670.87,411.03 1759.85,411.03 ; R10.1 1841.55,540.27 C10.1 C10.1 1841.62,467.59 1806.3,432.28 1780.08,432.28 1774.23,426.42 1774.23,425.4 1759.85,411.03 ; S1.2@2702.96,484.36 2647.73,429.13 Q3.3 2443.41,429.13 2406.76,392.48 1778.4,392.48 1759.85,411.03
  Bottom Layer w10: v1(153.27,408.94) 171.77,408.94 324.49,256.22 334.33,256.22 373.7,216.85 1265.83,216.85 J1.4
GND: C2.2 C3.2 C4.2 C5.2 C6.2 C7.1 C8.2 C9.2 C10.2 C11.2 C12.2 C13.2 C14.2 D1.1 D2.1 D3.1 DS1.K J1.3 J1.16 J1.17 J2.8 J2.17 Q2.2 R5.2 R11.2 R13.1 S1.3 S1.4 S2.3 S2.4 U1.5 U1.SH1 U1.SH2 U1.SH3 U1.SH4 U1.SH5 U1.SH6 U2.1 U3.1 U3.15 U3.38 U3.39 U4.3 U4.29 | length 6658.8
  Top Layer w5: v1(53.52,998.21) 295.18,756.56 315.49,756.56 U3.39@346.34,725.71 ; 53.71,407.64 53.61,407.73 53.61,702.93 U3.39@369.12,702.93 ; v1(340.05,725.71) U3.39@346.34,725.71 ; v1(828.29,481.85) 826.4,481.85 823.68,479.13 761.81,479.13 755.12,472.44 708.66,472.44 502.76,678.35 U3.39 U3.39@369.12,702.93 ; v1(2460.87,679.36) 2480.32,698.82 2578.94,698.82 ; U3.39@346.34,725.71 U3.39@369.12,702.93
  Top Layer w10: U3.1 53.71,354.1 53.71,407.64 ; U3.38 53.52,1053.96 v1(53.52,998.21) ; v1(1299.21,483) C7.1@1359.1,483 ; v1(1377.95,590.55) 1378.16,590.75 C6.2@1438.03,590.75 ; C6.2@1438.4,590.8 C11.2@1515.59,590.8 ; C11.2 v1(1574.72,590.64) v1@1574.8,590.55 ; C3.2 1951.53,866.91 v1(2006.29,866.91) 2030.85,842.36 2030.85,819.6 2064.35,786.1 2090.46,786.1 2092.68,783.88 2131.33,783.88 2157.76,810.31 2185.4,810.31 2197.45,798.27 v1(2197.45,775.54) 2180.13,758.23 2180.13,728.37 C5.2 ; v1(2164.16,467.52) 2164.16,468.06 2164.86,468.76 2164.86,522.49 DS1.K ; R11.2 2252.72,991.62 2252.72,948.63 v1(2267.62,933.72) ; 2578.94,698.82 2616.24,661.53 S1.4 3067.4,661.53 3114.4,614.53 3157.92,614.53 3170.17,626.79 3171.75,626.79 3174.62,629.66 D2.1 ; R13.1 2628.04,994.09 C9.2 2632.83,920.4 2632.83,882.86 2606.27,856.3 C8.2 2611.85,849.75 2628.35,849.75 2637.14,840.96 2637.14,824.46 2658.77,802.82 S2.3 ; S2.4 3156.82,802.82 3170.48,789.16 3172.06,789.16 3174.93,786.29 D1.1 3226.99,784.71 3255.24,812.97 U1.SH2 3260.32,766.71 U1.5 3354.8,765.72 U1.SH5 U1.SH4 U1.SH3 ; C13.2 3102.03,1122.22 3102.75,1122.94 v1(3103.29,1122.94) ; C2.2 3111.83,515.16 3182.84,515.16 D3.1 3184.41,512.01 3187.29,509.13 3188.86,509.13 3228.35,469.65 3228.35,354.33 3188.98,314.96 3188.98,164.57 J1.16
  Top Layer w20: C14.2 885.6,856.52 v1(885.83,856.3) ; C12.2 v1(1830.79,810.19) v1@1830.93,810.06 ; J1.16 J1.17 3364.21,150.04 3364.21,574.34 U1.SH3
  Bottom Layer w10: Q2.2 3124.7,833.48 3124.7,894.38 R5.2 ; 3163.47,601.3 3163.47,573.09 C4.2 3217.25,573.04 U1.SH1 3260.79,615.64 3313.94,615.64 3352.84,576.75 U1.SH3 ; U1.SH6 3299.69,852.34 U1.SH2 3260.32,873.54 3210.95,922.91 3141.32,922.91 3132.54,914.12 3132.54,902.22 R5.2 ; J2.17 3362.63,1282.32 3302.19,1282.32 3200.97,1181.1 3161.46,1181.1 v1(3103.29,1122.94) 3103.29,916.37 3115.04,904.62 3115.04,902.91 3123.28,894.67 R5.2
  other v1: 340.81,620.8 394.95,620.8 447.95,620.86 341.13,673.02 445.08,674.52 2383.83,679.69 446.5,725.99 392.05,727.14 2383.47,758.8 2460.54,758.37 2157.38,809.93
IO0: C13.1 Q4.3 R8.2 R9.1 R9.2 S2.1 S2.2 U3.25 | length 3806.8
  Top Layer w5: U3.25 703.15,1042.52 718.37,1027.3 723.11,1027.3 816.15,934.26 816.15,857.08 847.14,826.09 1709.43,826.09 1832.2,703.32 v1(1832.2,610.54) ; v1(1914.3,609.71) 1914.3,608.27 1924.9,597.67 1924.9,476.68 1972.44,429.13 Q4.3 2388.73,458.29 2373.42,473.6 2342.33,473.6 2322.83,493.1 2322.83,511.81 2283.46,551.18 2283.46,738.43 2292.38,747.35 2292.38,880.1 v1(2304.16,891.87) ; S2.1 2705.75,980.43 v1(2705.75,1053.29)
  Top Layer w10: S2.1 S2.2 3018.3,1032.58 3041.34,1055.62 C13.1 2994.67,1082.68 2987.71,1089.63 R9.2 ; R8.2 R9.2 ; R9.1 R9.2
  Bottom Layer w5: v1(1832.2,610.54) 1832.62,610.12 1913.89,610.12 v1(1914.3,609.71) ; v1(2304.16,891.87) 2357.16,944.88 2478.72,944.88 2587.13,1053.29 v1(2705.75,1053.29)
IO0_Connector: J2.14 R8.1 | length 168.2
  Top Layer w10: J2.14 2901.97,1216.89 2888.7,1203.63 2888.7,1186.78 2903.75,1171.73 R8.1
IO2: J2.15 U3.24 | length 2582.5
  Top Layer w10: v1(695.11,928.62) 757.36,928.62 U3.24
  Bottom Layer w10: v1(695.11,928.62) 695.11,941.17 748.35,994.41 1417.64,994.41 1504.96,1081.73 1801.48,1081.73 1825.67,1105.92 2130.4,1105.92 2156.69,1132.2 2285.02,1132.2 2314.55,1161.73 2597.5,1161.73 2617.18,1181.42 2677.48,1181.42 2716.54,1220.47 2988.98,1220.47 J2.15
IO4: J2.13 U3.26 | length 2264.3
  Top Layer w10: v1(651.25,1000.18) U3.26@651.25,1048.65
  Bottom Layer w10: v1(651.25,1000.18) 674.38,1023.31 732.2,1023.31 733.64,1021.87 1415.57,1021.87 1495.43,1101.73 1793.2,1101.73 1817.38,1125.92 2122.12,1125.92 2148.4,1152.2 2274.25,1152.2 2303.78,1181.73 2589.21,1181.73 2618.11,1210.63 2647.64,1210.63 2726.38,1289.37 J2.13
IO5: J2.10 U3.29 | length 1964.3
  Top Layer w10: v1(503.12,999.33) U3.29@503.12,1051.72
  Bottom Layer w10: v1(503.12,999.33) 503.12,1025.52 560.9,1083.31 757.06,1083.31 758.49,1081.87 991.9,1081.87 993.34,1083.31 1378.58,1083.31 1457.01,1161.73 1768.34,1161.73 1792.53,1185.92 2091.43,1185.92 2127.38,1221.87 2210.85,1221.87 J2.10
IO12: J1.15 U3.14 | length 2613.6
  Top Layer w10: U3.14@701.52,346.49 v1(701.52,438.54)
  Bottom Layer w10: v1(701.52,438.54) 2848.87,438.54 3050,237.4 J1.15
IO13: J1.2 U3.16 | length 561.7
  Top Layer w10: U3.16 848.82,529.13 866.14,511.81 866.14,275.59 925.2,216.54 954.33,216.54 J1.2
IO14: J1.14 U3.13 | length 2552.3
  Top Layer w10: U3.13@652.39,346.59 v1(652.39,417.85)
  Bottom Layer w10: v1(652.39,417.85) 652.7,417.54 2705.85,417.54 2706.85,418.54 2839.34,418.54 2894.09,363.78 J1.14
IO15: J2.16 U3.23 | length 2754.2
  Top Layer w10: v1(697.99,880.22) 698.53,880.22 699.61,879.13 U3.23
  Bottom Layer w10: v1(697.99,880.22) 697.99,894.84 777.56,974.41 1427.17,974.41 1505.28,1052.52 1800.55,1052.52 1833.95,1085.92 2139.07,1085.92 2165.35,1112.2 2293.31,1112.2 2322.83,1141.73 2618.11,1141.73 2637.8,1161.42 2687.01,1161.42 2726.06,1200.47 3011.5,1200.47 3031.5,1220.47 3144.88,1220.47 J2.16
IO16: J2.12 U3.27 | length 2182.9
  Top Layer w10: v1(601.31,1000.18) 601.31,1050.81 U3.27@601.73,1051.24
  Bottom Layer w10: v1(601.31,1000.18) 601.31,1037.45 607.17,1043.31 740.49,1043.31 741.93,1041.87 1008.47,1041.87 1009.9,1043.31 1408.72,1043.31 1487.15,1121.73 1784.91,1121.73 1809.1,1145.92 2113.83,1145.92 2140.12,1172.2 2264.72,1172.2 2294.39,1201.87 2502.66,1201.87 J2.12
IO17: J2.11 U3.28 | length 2074.3
  Top Layer w10: v1(552.22,1000.18) 552.22,1050.67 U3.28@552.73,1051.18
  Bottom Layer w10: v1(552.22,1000.18) 552.22,1034.5 581.02,1063.31 748.77,1063.31 750.21,1061.87 1000.18,1061.87 1001.62,1063.31 1397.95,1063.31 1476.38,1141.73 1776.63,1141.73 1800.81,1165.92 2101.27,1165.92 2127.56,1192.2 2235.51,1192.2 2265.18,1221.87 2366.75,1221.87 J2.11
IO18: DS2.K J2.9 U3.30 | length 2296.3
  Top Layer w10: v1(451.91,1000.18) 451.91,1000.72 453.18,1001.98 U3.30@453.18,1051.18 ; DS2.K 2122.28,963.62 2111.78,974.12 2111.78,1020.07 2129.32,1037.61 2129.32,1282.49 J2.9
  Bottom Layer w10: v1(451.91,1000.18) 451.91,1042.46 512.76,1103.31 765.34,1103.31 766.78,1101.87 983.62,1101.87 985.05,1103.31 1359.21,1103.31 1437.64,1181.73 1760.06,1181.73 1788.96,1210.63 2043.7,1210.63 J2.9
IO19: J2.7 U3.31 | length 1616.2
  Top Layer w10: v1(402.54,999.51) 402.54,1051.74 U3.31@402.69,1051.89
  Bottom Layer w10: v1(402.54,999.51) 402.54,1058.27 467.58,1123.31 773.63,1123.31 775.06,1121.87 975.33,1121.87 976.77,1123.31 1347.2,1123.31 1425.76,1201.87 1723.13,1201.87 J2.7
IO21: J2.6 U3.33 | length 1572.5
  Top Layer w10: v1(302.87,999.5) U3.33@302.87,1051.45
  Bottom Layer w10: v1(302.87,999.5) 302.87,1080.42 365.75,1143.31 781.91,1143.31 783.35,1141.87 967.05,1141.87 968.48,1143.31 1338.91,1143.31 1417.48,1221.87 1587.22,1221.87 J2.6
IO22: J2.3 U3.36 | length 1251
  Top Layer w10: v1(152.8,995.3) U3.36@152.8,1052.18
  Bottom Layer w10: v1(152.8,995.3) 152.8,1058.31 297.8,1203.31 806.76,1203.31 808.2,1201.87 942.19,1201.87 943.63,1203.31 1100.94,1203.31 J2.3
IO23: J2.2 R6.2 U3.37 | length 3959.3
  Top Layer w5: J2.2 1023.62,1281.89 1023.62,1181.1 1101.38,1103.35 v1(1101.38,939.09)
  Top Layer w10: v1(102.89,996.98) U3.37@102.89,1052.32
  Bottom Layer w5: v1(1101.38,939.09) 1102.15,939.09 1254.06,939.09 1271.87,956.91 1434.41,956.91 1437.69,960.19 1740.44,960.19 1766.76,933.87 2069.51,933.87 2080.53,944.88 2165.35,944.88 2236.86,873.37 2512.45,873.37 2598.43,787.4 2598.43,748.03 2637.8,708.66 2677.17,708.66 2999.31,386.52 3143.51,386.52 3167.01,410.03 R6.2
  Bottom Layer w10: v1(102.89,996.98) 102.89,1057.61 268.58,1223.31 815.05,1223.31 816.48,1221.87 933.91,1221.87 935.35,1223.31 965.04,1223.31 J2.2
IO25: J1.11 U3.10 | length 2139.1
  Top Layer w10: v1(502.39,406.99) 502.39,348.55 U3.10@502.62,348.32
  Bottom Layer w10: v1(502.39,406.99) 552.53,356.85 2300.63,356.85 2426.38,231.1 J1.11
IO26: J1.12 U3.11 | length 2267.1
  Top Layer w10: U3.11@552.17,345.87 v1(552.17,407.96)
  Bottom Layer w10: v1(552.17,407.96) 583.28,376.85 2467.64,376.85 2549.21,295.28 2582.28,262.2 J1.12
IO27: J1.13 U3.12 | length 2308.7
  Top Layer w10: U3.12@603.4,346.39 603.58,346.57 v1(603.58,407.96)
  Bottom Layer w10: v1(603.58,407.96) 631.95,407.96 643.06,396.85 2496.85,396.85 2738.19,155.51 J1.13
IO32: J1.9 U3.8 | length 1879.3
  Top Layer w10: U3.8@402.83,347.32 v1(402.83,407.31)
  Bottom Layer w10: v1(402.83,407.31) 493.29,316.85 1945.35,316.85 J1.9
IO33: J1.10 U3.9 | length 2035.6
  Top Layer w10: U3.9@453.59,349.85 v1(453.59,407.31)
  Bottom Layer w10: v1(453.59,407.31) 524.05,336.85 2172.99,336.85 2270.47,239.37 J1.10
IO34: J1.7 U3.6 | length 1667.4
  Top Layer w10: v1(302.61,407.96) 302.61,407.42 303.62,406.42 U3.6@303.62,348.96
  Bottom Layer w10: v1(302.61,407.96) 433.73,276.85 1673.54,276.85 J1.7
IO35: J1.8 U3.7 | length 1774.7
  Top Layer w10: v1(352.07,407.64) 352.07,407.1 353.05,406.12 U3.7@353.05,347.68
  Bottom Layer w10: v1(352.07,407.64) 462.86,296.85 1809.45,296.85 J1.8
IO36_Sensor_VP: J1.6 U3.5 | length 1584.6
  Top Layer w10: v1(251.86,406.66) 251.86,351.93 U3.5@252.26,351.53
  Bottom Layer w10: v1(251.86,406.66) 401.67,256.85 1583.7,256.85 1628.67,211.88 1628.67,165.82 J1.6
IO39_Sensor_VN: J1.5 U3.4 | length 1448.5
  Top Layer w10: U3.4@203.05,353.88 203.56,354.39 v1(203.56,406.85)
  Bottom Layer w10: v1(203.56,406.85) 236.28,374.13 236.28,373.11 268.62,340.77 279.31,340.77 383.23,236.85 1401.73,236.85 J1.5
NetC4_1: C4.1 J3.2 R5.1 R6.1 | length 936.3
  Top Layer w10: v1(2836.86,371.28) 2890.96,371.28 2913.39,393.7 3107.37,393.7 v1@3133.92,420.25
  Bottom Layer w10: J3.2 2834.52,373.08 2836.32,371.28 v1(2836.86,371.28) ; v1(3133.92,420.79) 3133.54,421.18 3133.54,484.42 R6.1 3126.74,491.21 3126.74,570.27 3116.98,580.04 3116.98,593.65 3088.66,621.97 3088.66,763.38 3144.09,818.82 3144.09,850.78 3163.13,869.83 3163.13,894.03 R5.1
NetDS1_A: DS1.A R1.2 | length 64.5
  Top Layer w10: R1.2 2234.64,523.57 DS1.A
NetDS2_A: DS2.A R4.1 | length 67.3
  Top Layer w10: DS2.A 2193.72,876.75 R4.1
NetQ3_1: Q3.1 R14.2 | length 73.7
  Top Layer w10: R14.2@2632.29,589.26 2632.29,516.28 Q3.1
NetQ4_1: Q4.1 R16.2 | length 73.8
  Top Layer w10: Q4.1@2426.13,505.91 2449.76,482.28 R16.2
NetR2_1: R2.1 U4.9 | length 199
  Top Layer w5: U4.9 2460.63,897.87
  Top Layer w10: R2.1 2424.95,979.17 2424.95,933.55 2460.63,897.87
NetR11_1: R11.1 U4.11 | length 249.7
  Top Layer w5: U4.11 2421.26,854.57
  Top Layer w10: R11.1 2293.26,957.65 2377.54,873.37 2402.45,873.37 2421.26,854.57
NetR12_1: R12.1 R13.2 | length 71.6
  Top Layer w10: R12.1 2520.69,995.09 2589.5,995.09 R13.2
RTS: Q3.2 R16.1 U4.24 | length 242
  Top Layer w5: U4.24 2401.57,576.72 2415.04,563.25 2468.24,563.25 2490.16,541.34 R16.1 2494.19,515.75 Q3.2
RXD: R17.2 U4.25 | length 1291.9
  Top Layer w5: R17.2 1381.39,1003.45 1381.39,940.04 v1(1392.2,929.23) ; U4.25 2421.91,623.74 2421.91,585.92 v1(2422.56,585.27)
  Bottom Layer w5: v1(1392.2,929.23) 1413.65,907.78 1454.43,907.78 1535.43,826.77 1653.54,826.77 1732.28,748.03 1811.02,748.03 1889.76,669.29 2047.24,669.29 2125.98,590.55 2233.25,590.55 2233.68,590.12 2398.54,590.12 2403.39,585.27 v1(2422.56,585.27)
RXD0: J2.5 R15.1 U3.34 | length 1811.9
  Top Layer w10: v1(252.8,997.81) 252.8,1051.33 U3.34@253.36,1051.89 ; J2.5 1563.45,1224.74 1563.45,1061.48 1505.99,1004.02 R15.1
  Bottom Layer w10: v1(252.8,997.81) 252.8,1089.42 326.69,1163.31 790.19,1163.31 791.63,1161.87 958.76,1161.87 960.2,1163.31 1330.63,1163.31 1440.03,1272.7 1482.15,1272.7 J2.5
TXD: R15.2 U4.26 | length 1265.8
  Top Layer w5: R15.2 1466.45,939.16 1473.24,932.36 v1(1473.24,930.47) ; U4.26 2441.78,623.55 2441.78,596.77 2451.76,586.8 2461.08,586.8 v1(2462.42,585.46)
  Bottom Layer w5: v1@1472.56,929.02 1559.8,841.77 1677.91,841.77 1756.65,763.03 1835.39,763.03 1914.13,684.29 2071.61,684.29 2125.98,629.92 2415.37,629.92 2440.94,604.34 2440.94,597.43 2452.91,585.46 v1(2462.42,585.46)
TXD0: J2.4 R17.1 U3.35 | length 1680.7
  Top Layer w10: v1(202.74,997.39) U3.35@202.74,1052.47 ; R17.1 1342.34,1004.02 1299.13,1047.23 1299.13,1237.69 1342.91,1281.47 J2.4
  Bottom Layer w10: v1(202.74,997.39) 202.74,1068.88 317.17,1183.31 798.48,1183.31 799.92,1181.87 950.48,1181.87 951.92,1183.31 1176.4,1183.31 1275.41,1282.32 1335.86,1282.32 J2.4
USB_N: D2.2 Q1.1 U1.2 U4.5 | length 680.6
  Top Layer w5: 2608.25,700.47 2796.79,700.47 2799.29,697.97
  Top Layer w10: 2799.29,697.97 2933.46,697.97 2937.6,702.12 3057.6,702.12 3061.74,697.97 3165.89,697.97 3171.75,692.12 3171.75,686.08 D2.2 3177.5,686.08 3177.5,692.12 3183.36,697.97 3200.21,697.97 3206.44,691.75 3228.43,691.75 3228.51,691.67 3258.58,691.67 U1.2
USB_P: D1.2 Q1.3 Q2.1 Q2.3 U1.3 U4.4 | length 886.4
  Top Layer w5: 2608.25,715.47 2796.79,715.47 2799.29,717.97
  Top Layer w10: 2799.29,717.97 2925.17,717.97 2929.32,722.12 3065.88,722.12 3070.02,717.97 3166.2,717.97 3172.06,723.83 3172.06,729.87 D1.2 3177.81,729.87 3177.81,723.83 3183.66,717.97 3208.49,717.97 3214.72,711.75 3228.43,711.75 3228.51,711.82 3258.58,711.82 U1.3
  Bottom Layer w10: Q1.3 3121.24,648.98 3121.24,756.99 3144.09,779.84 Q2.1 3144.09,784.17 3163.77,803.86 Q2.3
pads on no net: Q1.2 U1.4 U2.4 U3.17 U3.18 U3.19 U3.20 U3.21 U3.22 U3.32 U4.1 U4.2 U4.10 U4.12 U4.13 U4.14 U4.15 U4.16 U4.17 U4.18 U4.19 U4.20 U4.21 U4.22 U4.23 U4.27

## Polygon pours and split planes (outlines as drawn)
no net on Int2 (PWR) (split plane): 3444.47,20.1 20.1,20.1 20.1,1426.75 3444.47,1426.75
no net on +3V3 (split plane): 3444.47,20.1 20.1,20.1 20.1,1426.75 3444.47,1426.75

## Text inside footprints (layer, text, board x,y; h text height)
DS1: Top Overlay "K" at 2093,513.08 h22; Top Overlay "A" at 2278.53,516.03 h20
DS2: Top Overlay "A" at 2235.53,868.42 h20; Top Overlay "K" at 2050,865.47 h22